# Altium PCB PONG_2.PcbDoc (part 2 of 3)
Units mm, origin at the board's own origin, x right, y up, seen from the top; angles counter-clockwise.
Board outline 310.01 x 220.09 mm, 2 copper layers (Top Layer, Bottom Layer); 106 components, 226 nets, 1005 pads, 373 vias.
Unrouted connection lines stored in the file: 5.
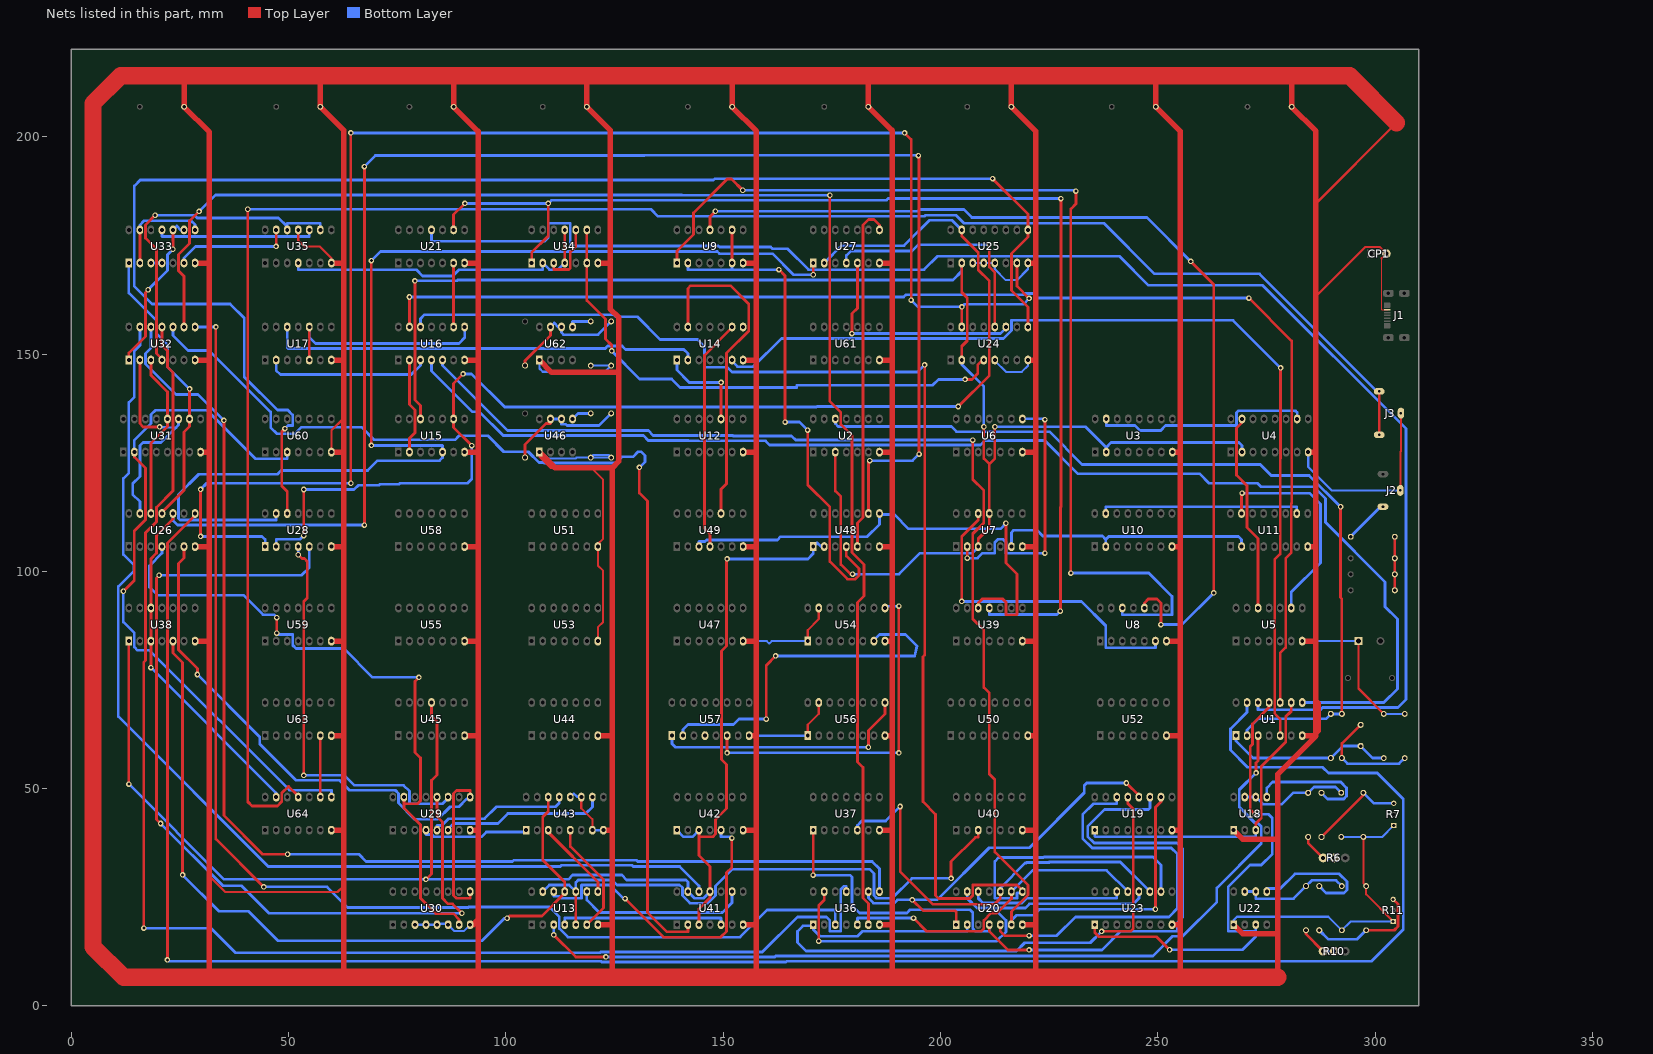
[diagram p2: the nets of this part, all layers, seen from the top]

## Via types
v1: diameter 1.27, hole 0.711, Top Layer to Bottom Layer, 373 vias

## Nets (pads, with @x,y where several pads share a name; then routed paths per layer and width w, separated by ;. In a path a pad name is that pad's centre, name@x,y a point inside that pad or via, vN(x,y) a via of type N, cw(c..) or ccw(c..) an arc to the next point about the centre after c; other vN are vias at no path point) (continued)
ATTRACT: U26.10 U38.3 U38.12 U48.9 U64.13 | length 429.5
  Top Layer w0.635: v1(18.288,77.851) U38.3@18.288,83.929 U38.12@18.288,91.549 18.288,102.895 19.558,104.165 19.558,108.229 23.368,112.039 U26.10@23.368,113.302 ; v1(67.412,110.642) v1(67.412,193.142) ; U48.9@183.404,113.302 183.404,125.136 v1(183.718,125.451) ; v1(194.894,195.656) 195.072,195.478 v1(195.072,126.949)
  Bottom Layer w0.635: v1(18.288,77.851) 47.117,49.022 U64.13@47.117,48.042 ; U26.10@23.368,113.302 23.368,111.658 24.384,110.642 v1(67.412,110.642) ; v1(67.412,193.142) 69.926,195.656 131.857,195.656 131.923,195.723 194.827,195.723 v1(194.894,195.656) ; v1(183.718,125.451) 193.573,125.451 v1(195.072,126.949)
B: U56.9 U57.1 | length 59.3
  Top Layer w0.635: v1(183.413,59.512) 183.413,63.332 187.214,67.132 U56.9@187.214,69.796
  Bottom Layer w0.635: U57.1@138.176,62.176 138.176,60.325 138.989,59.512 v1(183.413,59.512)
B1: U19.13 U20.2 U36.1 | length 156.8
  Top Layer w0.635: v1(237.058,17.145) 243.738,17.145 244.373,17.78 244.373,45.239 243.105,46.507 U19.13@243.105,48.042
  Bottom Layer w0.635: U36.1@170.704,18.669 U36.1@170.704,18.415 ; U20.2@206.142,18.669 206.142,17.145 181.975,17.145 180.85,16.02 172.28,16.02 170.704,17.597 U36.1@170.704,18.415 ; v1(237.058,17.145) 234.442,14.529 219.38,14.529 217.466,12.615 169.071,12.615 167.107,14.58 167.107,17.145 168.377,18.415 U36.1@170.704,18.415
B2: U20.9 U23.13 U36.5 | length 74.9
  Top Layer w0.635: v1(193.777,20.193) 196.825,17.145 209.321,17.145 209.956,17.78 209.956,19.685 211.633,21.361 213.004,21.361 216.302,24.659 U20.9@216.302,26.289
  Bottom Layer w0.635: U36.5@180.864,18.669 180.864,20.193 v1(193.777,20.193) ; U20.9@216.302,26.289 221.195,31.182 238.212,31.182 U23.13@243.105,26.289
B6: U29.4 U43.1 | length 25.1
  Bottom Layer w0.635: U29.4@81.593,40.422 81.593,39.428 82.967,39.428 83.498,38.897 94.38,38.897 95.482,39.998 104.639,39.998 U43.1@104.639,40.422
BALL: U12.10 U14.1 | length 22
  Top Layer w0.635: U12.10@149.49,135.055 v1(149.49,143.458)
  Bottom Layer w0.635: U14.1@139.33,148.611 139.33,146.304 142.175,143.458 v1(149.49,143.458)
BB: U24.4 U34.6 U34.9 | length 123.5
  Top Layer w0.635: U34.9@118.609,178.562 U34.6@118.609,170.942 118.609,162.306 122.885,158.03 122.885,153.467 124.333,152.019 v1(124.333,150.698) ; v1(205.655,144.145) 207.231,144.145 208.547,145.462 208.547,147.472 209.436,148.361 209.952,148.361 U24.4@209.952,148.611
  Bottom Layer w0.635: v1(124.333,150.698) 130.759,144.272 138.125,144.272 140.074,142.323 166.922,142.323 166.922,142.806 198.178,142.806 199.517,144.145 v1(205.655,144.145)
C: U54.7 U57.2 | length 83.1
  Top Layer w0.635: v1(159.893,66.002) 159.893,78.359 v1(162.052,80.518)
  Bottom Layer w0.635: U57.2@140.716,62.176 140.716,63.576 141.859,64.719 152.375,64.719 153.657,66.002 v1(159.893,66.002) ; v1(162.052,80.518) 194.056,80.518 194.564,82.804 191.926,85.442 185.941,85.442 184.674,84.176 U54.7@184.674,83.929
C1: U19.12 U20.1 U36.9 | length 92.4
  Top Layer w0.635: v1(193.497,24.395) 195.997,21.895 203.323,21.895 203.602,21.615 U20.1@203.602,18.669 ; v1(242.748,51.283) 245.645,48.386 U19.12@245.645,48.042
  Bottom Layer w0.635: U36.9@183.404,26.289 183.404,24.8 184.574,23.63 189.354,23.63 190.119,24.395 v1(193.497,24.395) 199.223,24.395 211.217,36.389 220.434,36.389 233.078,49.033 233.078,50.724 233.637,51.283 v1(242.748,51.283)
C2: U20.13 U23.12 U36.13 | length 106.9
  Top Layer w0.635: v1(171.983,14.885) 171.983,23.123 173.244,24.384 U36.13@173.244,26.289
  Bottom Layer w0.635: v1(171.983,14.885) 212.904,14.885 215.036,17.018 215.036,19.685 212.216,22.505 ; U20.13@206.142,26.289 206.142,24.769 208.406,22.505 212.216,22.505 ; U23.12@245.645,26.289 245.645,24.765 244.349,23.47 220.497,23.47 219.533,22.505 212.216,22.505
C5-EN: U14.8 U57.4
C6: U29.5 U43.13 | length 32.7
  Bottom Layer w0.635: U29.5@84.133,40.422 84.133,41.478 85.226,41.478 86.818,43.071 95.065,43.071 97.815,45.822 111.379,45.822 112.259,46.702 U43.13@112.259,48.042
CLK: U2.3 U3.2 U4.2 U7.3 U7.11 U15.12 U24.2 U25.2 | length 375.3
  Top Layer w0.635: v1(79.045,166.843) 79.045,139.415 80.323,138.137 U15.12@80.323,135.055 ; U2.3@175.784,127.435 175.784,118.502 177.063,117.223 177.063,101.546 179.268,99.342 v1(179.756,99.342) ; U24.2@204.872,148.611 204.872,151.786 206.146,153.06 206.146,162.937 204.872,164.211 U25.2@204.872,170.942 ; U7.3@208.682,105.682 208.682,107.501 211.222,110.041 U7.11@211.222,113.302 ; v1(209.956,133.274) 209.956,125.933 211.226,124.663 ; v1(212.496,133.274) 212.496,125.933 211.226,124.663 ; U7.11@211.222,113.302 211.222,124.659 211.226,124.663 ; U7.11@211.222,113.302 211.226,124.663
  Bottom Layer w0.635: v1(79.045,166.843) 88.704,166.843 88.908,167.047 202.861,167.047 204.872,169.058 U25.2@204.872,170.942 ; v1(179.756,99.342) 190.452,99.342 195.275,104.165 207.391,104.165 208.682,105.457 U7.3@208.682,105.682 ; U24.2@204.872,148.611 204.872,147.633 209.956,142.549 v1(209.956,133.274) ; v1(212.496,133.274) 233.375,133.274 238.125,128.524 ; U3.2@238.125,127.435 238.125,128.524 ; U4.2@269.367,127.435 269.367,128.905 268.63,129.642 239.243,129.642 238.125,128.524
D: U54.9 U57.6 | length 80.9
  Top Layer w0.635: v1(150.876,58.217) U57.6@150.876,62.176 ; v1(190.398,58.217) v1(190.398,91.983)
  Bottom Layer w0.635: v1(150.876,58.217) v1(190.398,58.217) ; U54.9@187.214,91.549 187.214,91.983 v1(190.398,91.983)
D1: U19.11 U20.4 U37.1 | length 176.1
  Top Layer w0.635: v1(170.688,30.074) 170.704,30.09 U37.1@170.704,40.422 ; U20.4@211.222,18.669 211.222,17.145 215.49,12.878 v1(220.396,12.878)
  Bottom Layer w0.635: v1(170.688,30.074) 179.146,30.074 179.603,29.616 179.603,23.099 181.342,21.36 192.248,21.36 193.011,22.123 206.781,22.123 207.416,21.488 207.416,17.78 208.051,17.145 211.222,17.145 U20.4@211.222,18.669 ; v1(220.396,12.878) 237.134,12.878 241.412,17.155 254.524,17.155 254.524,19.202 255.676,20.355 255.676,36.195 254.381,37.49 235.382,37.49 233.858,39.014 233.858,41.3 237.769,45.212 247.88,45.212 248.185,45.517 U19.11@248.185,48.042
D2: U20.10 U23.11 U37.5 | length 96.7
  Top Layer w0.635: v1(190.703,45.872) 190.703,30.886 198.23,23.359 212.357,23.359 213.762,24.765 U20.10@213.762,26.289
  Bottom Layer w0.635: U37.5@180.864,40.422 180.864,41.536 181.864,42.536 187.366,42.536 v1(190.703,45.872) ; U20.10@213.762,26.289 213.762,27.149 219.477,32.864 219.734,32.864 219.855,32.984 224.994,32.984 224.994,33.121 241.353,33.121 U23.11@248.185,26.289
D6: U29.6 U43.10 | length 37.8
  Bottom Layer w0.635: U29.6@86.673,40.422 86.673,40.665 87.943,41.936 98.121,41.936 100.432,44.247 118.364,44.247 119.879,45.762 U43.10@119.879,48.042
GND: C1.1 C2.1 C4.1 C5.1 C6.1 C7.1 C8.1 C9.1 C10.1 C11.1 CN1.1 CN2.1 CN3.1 CN4.1 CN5.1 CN6.1 CN7.1 CN8.1 CN9.1 CP1.2 J1.5 J2.1 J3.1 R7.1 R11.1 S1.1 U1.7 U2.7 U3.8 U4.8 U5.7 U6.7 U7.7 U8.7 U9.7 U10.8 U11.8 U12.7 U13.7 U14.7 U15.7 U16.7 U17.7 U18.1 U19.8 U20.7 U21.7 U22.1 U23.8 U24.5 U24.8 U25.3 U25.4 U25.5 U25.8 U26.7 U27.7 U28.7 U29.8 U30.3 U30.4 U30.5 U30.6 U30.8 U31.8 U32.7 U33.7 U34.7 U35.7 U35.11 U36.7 U37.7 U38.7 U39.7 U40.7 U41.7 U42.7 U43.7 U43.8 U43.11 U43.12 U44.7 U45.7 U46.1 U47.7 U48.7 U49.7 U50.8 U51.7 U52.7 U53.7 U54.1 U54.8 U54.15 U55.7 U56.1 U56.8 U56.15 U57.8 U58.7 U59.7 U60.7 U61.7 U62.1 U63.7 U64.7 | length 3573.5
  Top Layer w0.175: 301.549,172.037 301.549,160.177 J1.5@302.756,160.177
  Top Layer w0.508: 31.732,83.929 31.75,83.911 31.75,29.845 35.408,26.187 61.214,26.187 62.647,27.621 62.647,40.422 ; U35.11@52.197,178.562 52.197,176.149 53.594,174.752 57.15,174.752 59.817,172.085 U35.7@59.817,170.942 ; U60.7@59.817,127.435 59.817,132.385 62.59,135.158 62.59,148.611 ; U46.1@107.696,127.435 107.696,126.365 110.236,123.825 111.306,123.825 119.609,123.825 122.352,121.082 122.352,107.502 121.149,106.299 U51.7@121.149,105.682 121.149,101.346 122.352,100.143 122.352,88.341 121.149,87.138 U53.7@121.149,83.929 ; U43.11@117.339,48.042 117.339,45.491 119.879,42.951 U43.7@119.879,40.422 ; U56.1@169.434,62.176 169.434,64.694 171.974,67.234 U56.15@171.974,69.796 ; U54.1@169.434,83.929 169.434,86.462 171.974,89.002 U54.15@171.974,91.549 ; U4.8@284.607,127.435 285.55,127.435 286.385,128.27 ; 286.312,62.176 287.274,63.137 287.274,69.825 286.385,70.714 286.385,83.929 286.385,105.682 286.385,127.435 286.385,128.27 ; S1.1@296.164,83.947 296.164,73.025 C1.1@302.006,67.183 ; C5.1@297.307,38.862 297.307,28.194 C7.1@297.942,27.559 297.942,25.654 R11.1@304.165,19.431 ; 301.549,172.037 CP1.2@302.613,173.101 301.114,174.6 297.688,174.6 286.385,163.297 ; 304.927,203.2 286.385,184.658 286.385,163.297 ; J2.1@305.816,118.618 305.816,127.508 305.943,127.635 J3.1@305.943,136.398 ; 286.385,128.27 286.385,163.297
  Top Layer w1.27: 25.908,213.995 CN1.1@25.908,206.883 31.75,201.041 31.75,83.929 ; U38.7@28.448,83.929 31.732,83.929 ; U26.7@28.448,105.682 31.75,105.682 ; U32.7@28.448,148.611 31.75,148.611 ; U33.7@28.448,170.942 31.75,170.942 ; U31.8@29.718,127.435 31.75,127.435 ; 31.75,6.54 31.75,83.947 ; 57.277,213.995 CN2.1@57.277,206.883 62.611,201.549 62.611,40.386 62.611,6.54 ; U64.7@59.817,40.422 62.647,40.422 ; U63.7@59.817,62.176 62.611,62.176 ; U59.7@59.817,83.929 62.611,83.929 ; U28.7@59.817,105.682 62.611,105.682 ; U60.7@59.817,127.435 62.611,127.435 ; U17.7@59.817,148.611 62.59,148.611 ; U35.7@59.817,170.942 62.611,170.942 ; 87.943,213.995 CN3.1@87.943,206.883 93.599,201.227 93.599,19.812 ; U45.7@90.483,62.176 93.599,62.176 ; U55.7@90.483,83.929 93.599,83.929 ; U58.7@90.483,105.682 93.599,105.682 ; U15.7@90.483,127.435 93.599,127.435 ; U16.7@90.483,148.611 93.599,148.611 ; U21.7@90.483,170.942 93.599,170.942 ; U30.8@91.753,18.669 92.456,18.669 93.599,19.812 ; U29.8@91.753,40.422 93.599,40.422 ; 93.599,6.54 93.599,19.812 ; U46.1@107.696,127.435 111.306,123.825 124.46,123.825 ; U62.1@107.696,148.611 110.511,145.796 125.984,145.796 ; 118.609,213.995 CN4.1@118.609,206.883 123.952,201.54 123.952,160.401 125.984,158.369 125.984,125.349 124.46,123.825 ; U13.7@121.149,18.669 124.46,18.669 ; U44.7@121.149,62.176 124.46,62.176 ; U34.7@121.149,170.942 123.952,170.942 ; U43.8@122.419,40.422 124.46,40.422 ; 124.46,6.54 124.46,123.825 ; 152.03,213.995 CN5.1@152.03,206.883 157.607,201.306 157.607,7.048 157.099,6.54 ; U41.7@154.57,18.669 157.607,18.669 ; U42.7@154.57,40.422 157.607,40.422 ; U47.7@154.57,83.929 157.607,83.929 ; U49.7@154.57,105.682 157.607,105.682 ; U12.7@154.57,127.435 157.607,127.435 ; U14.7@154.57,148.611 157.607,148.611 ; U9.7@154.57,170.942 157.607,170.942 ; U57.8@155.956,62.176 157.607,62.176 ; 183.404,213.995 CN6.1@183.404,206.883 188.849,201.438 188.849,6.54 ; U36.7@185.944,18.669 188.849,18.669 ; U37.7@185.944,40.422 188.849,40.422 ; U48.7@185.944,105.682 188.849,105.682 ; U2.7@185.944,127.435 188.849,127.435 ; U61.7@185.944,148.611 188.849,148.611 ; U27.7@185.944,170.942 188.849,170.942 ; U56.8@187.214,62.176 188.849,62.176 ; U54.8@187.214,83.929 188.849,83.929 ; 216.302,213.995 CN7.1@216.302,206.883 221.869,201.316 221.869,6.54 ; U20.7@218.842,18.669 221.869,18.669 ; U40.7@218.842,40.422 221.869,40.422 ; U39.7@218.842,83.929 221.869,83.929 ; U7.7@218.842,105.682 221.869,105.682 ; U6.7@218.842,127.435 221.869,127.435 ; U50.8@220.112,62.176 221.869,62.176 ; U24.8@220.112,148.611 221.869,148.611 ; U25.8@220.112,170.942 221.869,170.942 ; 249.555,213.995 CN8.1@249.555,206.883 255.143,201.295 255.143,6.54 ; U52.7@251.995,62.176 255.143,62.176 ; U8.7@251.995,83.929 255.143,83.929 ; U23.8@253.265,18.669 255.143,18.669 ; U19.8@253.265,40.422 255.143,40.422 ; U10.8@253.265,105.682 255.143,105.682 ; U3.8@253.365,127.435 255.143,127.435 ; U22.1@267.462,18.669 269.494,16.637 277.622,16.637 ; U18.1@267.462,40.422 269.53,38.354 277.622,38.354 ; 277.622,6.54 277.622,53.34 286.385,62.103 286.385,201.295 CN9.1@280.797,206.883 280.797,213.995 ; U1.7@283.242,62.176 286.312,62.176 ; U5.7@283.242,83.929 286.385,83.929 ; U11.8@284.512,105.682 286.385,105.682 ; U4.8@284.607,127.435 286.385,127.435
  Top Layer w4: 31.115,6.54 62.611,6.54 93.599,6.54 124.46,6.54 157.099,6.54 188.849,6.54 221.869,6.54 255.143,6.54 277.622,6.54 ; 31.75,6.54 12.002,6.54 4.953,13.589 4.953,207.645 11.303,213.995 25.908,213.995 57.277,213.995 87.943,213.995 118.609,213.995 152.03,213.995 183.404,213.995 216.302,213.995 249.555,213.995 280.797,213.995 294.132,213.995 304.927,203.2
  Bottom Layer w0.508: U30.3@79.053,18.669 U30.4@81.593,18.669 U30.5@84.133,18.669 84.349,18.885 86.673,18.885 U30.6@86.673,18.669 88.146,17.196 90.28,17.196 U30.8@91.753,18.669 ; U46.1@107.696,127.435 107.696,126.746 108.921,126.746 109.683,125.984 116.037,125.984 116.218,126.165 C8.1@119.507,126.165 ; U62.1@107.696,148.611 107.696,146.685 108.458,145.923 122.788,145.923 C11.1@124.206,147.341 C10.1@119.507,147.341 ; U43.12@114.799,48.042 115.616,48.86 116.434,48.042 U43.11@117.339,48.042 ; U43.7@119.879,40.422 U43.8@122.419,40.422 ; U47.7@154.57,83.929 160.038,83.929 160.581,83.385 161.124,83.929 U54.1@169.434,83.929 ; U57.8@155.956,62.176 U56.1@169.434,62.176 ; U25.3@207.412,170.942 U25.4@209.952,170.942 U25.5@212.492,170.942 212.492,169.545 215.032,167.005 217.572,167.005 220.112,169.545 U25.8@220.112,170.942 ; U24.5@212.492,148.611 212.492,148.479 215.08,145.891 218.694,145.891 220.112,147.31 U24.8@220.112,148.611 ; U22.1@267.462,18.669 267.462,19.736 268.224,20.498 289.255,20.498 C6.1@292.354,17.399 294.386,19.431 R11.1@304.165,19.431 ; U5.7@283.242,83.929 289.687,83.929 289.705,83.947 S1.1@296.164,83.947 ; U4.8@284.607,127.435 284.607,123.977 289.966,118.618 J2.1@305.816,118.618 ; C4.1@292.227,38.862 C5.1@297.307,38.862 301.625,38.862 R7.1@304.292,41.529 ; C1.1@302.006,67.183 C2.1@306.832,67.183 ; C8.1@119.507,126.165 120.118,126.776 123.595,126.776 C9.1@124.206,126.165 C8.1@119.507,126.165
HBLANK: U9.2 U9.6 U9.9 U48.4 | length 122.2
  Top Layer w0.635: U9.6@152.03,170.942 U9.9@152.03,178.562 ; v1(162.814,169.418) 164.211,168.021 v1(164.211,134.341) ; v1(169.418,132.486) 169.418,119.913 174.523,114.808 174.523,102.244 178.574,98.193 180.367,98.193 181.229,99.055 181.229,100.6 178.324,103.505 U48.4@178.324,105.682
  Bottom Layer w0.635: U9.2@141.87,170.942 141.87,169.418 152.03,169.418 ; U9.6@152.03,170.942 152.03,169.418 ; v1(162.814,169.418) 152.03,169.418 ; v1(164.211,134.341) 167.564,134.341 v1(169.418,132.486)
HIT: U38.1 U41.3 U41.11 U41.13 U42.1 U42.3 U45.11 U48.1 U48.2 | length 347.4
  Top Layer w0.635: v1(13.208,51.029) U38.1@13.208,83.929 ; v1(81.588,29.111) 82.855,30.378 82.855,51.892 84.125,53.162 84.125,65.414 82.863,66.676 U45.11@82.863,69.796 ; U41.3@144.41,18.669 144.41,22.332 146.95,24.872 U41.11@146.95,26.289 146.95,32.08 144.41,34.62 144.41,38.887 ; U42.3@144.41,40.422 144.41,38.887 ; v1(150.901,102.845) 150.77,102.713 150.77,82.804 149.606,81.64 149.606,56.693 150.76,55.539 150.76,45.39 148.23,42.86 148.23,39.544 147.574,38.887 144.41,38.887
  Bottom Layer w0.635: v1(13.208,51.029) 35.125,29.111 v1(81.588,29.111) 114.344,29.111 115.316,30.083 126.671,30.083 127.772,28.981 141.362,28.981 141.87,28.473 U41.13@141.87,26.289 143.394,24.765 145.426,24.765 U41.11@146.95,26.289 ; U42.1@139.33,40.422 140.865,38.887 142.875,38.887 U42.3@144.41,40.422 ; v1(150.901,102.845) 169.485,102.845 170.704,104.064 U48.1@170.704,105.682 171.585,106.563 172.466,105.682 U48.2@173.244,105.682
"HIT SOUND": U31.2 U60.3 U64.8 | length 157.8
  Top Layer w0.635: v1(11.938,95.402) 14.478,97.942 14.478,109.322 17.018,111.862 17.018,123.774 14.478,126.314 U31.2@14.478,127.435
  Bottom Layer w0.635: v1(11.938,95.402) 11.938,88.341 14.478,85.801 14.478,82.55 15.215,81.813 17.983,81.813 50.165,49.632 59.817,49.632 U64.8@59.817,48.042 ; U31.2@14.478,127.435 14.478,130.175 18.288,133.985 18.288,136.042 19.304,137.058 31.161,137.058 42.311,125.908 49.657,125.908 U60.3@49.657,127.435
"HIT SOUND EN": U63.6 U64.9 | length 14.1
  Top Layer w0.635: U64.9@57.277,48.042 U63.6@57.277,62.176
HRESET: U7.6 U10.2 U11.2 | length 61.1
  Bottom Layer w0.635: U7.6@216.302,105.682 216.302,108.904 216.859,109.461 222.161,109.461 223.519,108.102 237.237,108.102 238.025,107.315 ; U10.2@238.025,105.682 238.025,107.315 ; U11.2@269.272,105.682 269.272,107.315 268.586,108.001 238.71,108.001 238.025,107.315
L: U21.9 U34.1 U39.11 | length 273.3
  Top Layer w0.635: U21.9@87.943,178.562 87.943,182.075 v1(90.526,184.658) ; U34.1@105.909,170.942 105.909,173.371 109.728,177.19 v1(109.728,184.658) ; v1(227.559,90.83) 227.625,90.897 227.625,114.719 227.719,114.813 v1(227.719,185.776)
  Bottom Layer w0.635: v1(90.526,184.658) v1(109.728,184.658) 110.439,185.369 187.503,185.369 187.909,185.776 v1(227.719,185.776) ; U39.11@211.222,91.549 211.222,90.035 226.764,90.035 v1(227.559,90.83)
MISSED: U39.12 U48.8 U49.3 | length 113.5
  Top Layer w0.635: U39.12@208.682,91.549 208.682,92.71 209.648,93.675 214.249,93.675 215.036,92.888 215.036,90.018 217.511,90.018 217.576,90.083 217.576,99.365 215.036,101.905 v1(215.036,111.049)
  Bottom Layer w0.635: U49.3@144.41,105.682 144.41,106.873 145.783,106.873 146.137,107.226 162.459,107.226 163.209,107.975 183.134,107.975 185.944,110.785 U48.8@185.944,113.055 ; U48.8@185.944,113.302 U48.8@185.944,113.055 ; v1(215.036,111.049) 213.766,109.779 192.659,109.779 189.382,113.055 U48.8@185.944,113.055
MOVE: U34.2 U34.4 U34.11 U35.4 | length 74.5
  Top Layer w0.635: U34.4@113.529,170.942 U34.11@113.529,178.562
  Bottom Layer w0.635: U35.4@52.197,170.942 52.197,169.418 79.344,169.418 80.784,167.978 87.798,167.978 89.237,169.418 108.449,169.418 U34.2@108.449,170.942 109.973,169.418 112.005,169.418 U34.4@113.529,170.942
NET: U14.2 U17.12 | length 99.5
  Bottom Layer w0.635: U17.12@49.657,156.231 49.657,151.46 49.835,151.282 122.833,151.282 123.384,151.833 126.727,151.833 127.511,151.049 140.917,151.049 141.87,150.097 U14.2@141.87,148.611
NetC1_2: C1.2 R1.2 U1.1 Y1.1 | length 39.1
  Bottom Layer w0.635: U1.1@268.002,62.176 268.002,60.96 271.939,57.023 R1.2@289.814,57.023 292.581,59.79 Y1.1@296.672,59.79 299.439,57.023 C1.2@302.006,57.023
NetC2_2: C2.2 R2.2 Y1.2 | length 25
  Top Layer w0.635: R2.2@292.354,57.023 292.354,60.352 Y1.2@296.672,64.67
  Bottom Layer w0.635: R2.2@292.354,57.023 293.649,55.728 305.537,55.728 C2.2@306.832,57.023
NetC3_1: C3.1 R3.2 R4.2 R5.2 | length 12.3
  Top Layer w0.635: R5.2@304.546,95.631 R4.2@304.546,99.314 R3.2@304.546,102.997 C3.1@304.546,107.95
NetC3_2: C3.2 J2.2 | length 10.3
  Bottom Layer w0.635: C3.2@294.386,107.95 301.304,114.868 J2.2@301.816,114.868
NetC4_2: C4.2 R8.1 U18.6 U18.7 | length 25.1
  Bottom Layer w0.635: U18.7@270.002,48.042 U18.6@272.542,48.042 274.178,46.406 278.536,46.406 281.153,49.022 R8.1@284.607,49.022 285.928,50.343 290.906,50.343 C4.2@292.227,49.022
NetC5_2: C5.2 R7.3 R9.2 | length 22.1
  Top Layer w0.635: R9.2@287.655,38.862 297.307,48.514 C5.2@297.307,49.022
  Bottom Layer w0.635: C5.2@297.307,49.022 299.72,46.609 R7.3@304.292,46.609
NetC6_2: C6.2 R12.1 U22.6 U22.7 | length 26.3
  Bottom Layer w0.635: U22.7@270.002,26.289 U22.6@272.542,26.289 272.542,24.663 281.203,24.663 R12.1@284.099,27.559 285.42,28.88 291.033,28.88 C6.2@292.354,27.559
NetC7_2: C7.2 R11.3 R13.2 | length 26.9
  Top Layer w0.635: C7.2@297.942,17.399 304.419,17.399 305.283,18.263 305.283,23.393 R11.3@304.165,24.511
  Bottom Layer w0.635: R13.2@287.147,17.399 289.204,15.342 295.885,15.342 C7.2@297.942,17.399
NetC8_2: C8.2 U46.5 | length 4.7
  Bottom Layer w0.635: U46.5@115.316,135.055 116.586,136.325 C8.2@119.507,136.325
NetC9_2: C9.2 R15.1 U46.6 U46.7 | length 28.4
  Top Layer w0.635: R15.1@104.394,126.165 104.394,129.143 109.236,133.985 110.236,133.985 U46.7@110.236,135.055
  Bottom Layer w0.635: U46.7@110.236,135.055 U46.6@112.776,135.055 112.776,133.862 113.712,133.862 114.046,133.528 121.408,133.528 C9.2@124.206,136.325
NetC10_2: C10.2 U62.5 | length 5.5
  Bottom Layer w0.635: U62.5@115.316,156.231 115.316,157.501 C10.2@119.507,157.501
NetC11_2: C11.2 R16.1 U62.6 U62.7 | length 28.8
  Top Layer w0.635: R16.1@104.394,147.341 104.394,148.463 110.236,154.305 U62.7@110.236,156.231
  Bottom Layer w0.635: U62.7@110.236,156.231 111.117,157.112 111.998,156.231 U62.6@112.776,156.231 112.776,154.94 113.262,154.454 121.159,154.454 C11.2@124.206,157.501
NetJ3_2: J3.2 J3.5 U64.11 | length 440.5
  Top Layer w0.635: v1(40.564,183.312) 40.564,46.965 41.529,45.999 47.396,45.999 48.387,46.99 48.387,48.946 49.962,50.521 52.197,48.285 U64.11@52.197,48.042 ; J3.2@300.943,131.398 J3.5@300.943,141.398
  Bottom Layer w0.635: v1(40.564,183.312) 133.401,183.312 135.026,181.686 196.266,181.686 196.494,181.915 203.606,181.915 205.435,180.086 237.617,180.086 249.25,168.453 273.376,168.453 300.431,141.398 J3.5@300.943,141.398
NetR1_1: R1.1 R2.1 U1.2 U2.12 | length 197.7
  Top Layer w0.635: v1(292.053,114.855) 292.053,93.95 292.354,93.65 R2.1@292.354,67.183
  Bottom Layer w0.635: U2.12@175.784,135.055 175.784,133.985 176.444,133.325 202.489,133.325 203.683,132.131 225.044,132.131 232.57,124.604 273.566,124.604 276.098,122.072 284.836,122.072 v1(292.053,114.855) ; U1.2@270.542,62.176 270.542,63.489 273.097,66.045 288.676,66.045 R1.1@289.814,67.183 R2.1@292.354,67.183
NetR6_CCW: R6.CCW R6.W R8.2 | length 8.8
  Top Layer w0.635: R8.2@284.607,38.862 284.607,37.465 R6.CCW@288.036,34.036
  Bottom Layer w0.635: R6.CCW@288.036,34.036 R6.W@290.576,34.036
NetR9_1: R9.1 U18.5 | length 30.1
  Bottom Layer w0.635: U18.5@275.082,48.042 275.082,50.165 276.403,51.486 292.1,51.486 293.421,50.165 293.421,48.26 292.786,47.625 289.052,47.625 R9.1@287.655,49.022
NetR10_CCW: R10.CCW R10.W R12.2 | length 9
  Top Layer w0.635: R12.2@284.099,17.399 284.099,16.51 R10.CCW@288.036,12.573
  Bottom Layer w0.635: R10.CCW@288.036,12.573 R10.W@290.576,12.573
NetR13_1: R13.1 U22.5 | length 30.6
  Bottom Layer w0.635: U22.5@275.082,26.289 275.082,27 278.181,27 281.559,30.378 291.744,30.378 293.548,28.575 293.548,26.67 292.837,25.959 288.747,25.959 R13.1@287.147,27.559
NetU1_3: U1.3 U13.3 | length 209
  Top Layer w0.635: v1(110.989,16.341) 116.078,11.252 v1(122.987,11.252) ; v1(272.618,53.619) 272.618,55.924 273.082,56.388 U1.3@273.082,62.176
  Bottom Layer w0.635: v1(110.989,16.341) U13.3@110.989,18.669 ; v1(122.987,11.252) 123.006,11.233 161.83,11.233 162.077,11.48 248.869,11.48 253.409,16.02 255.659,16.02 263.576,23.937 263.576,27.153 273.812,37.389 273.812,41.275 272.948,42.139 272.313,42.139 268.732,45.72 268.732,49.733 v1(272.618,53.619)
NetU1_5: U1.5 U14.6 | length 223.1
  Top Layer w0.635: U1.5@278.162,62.176 278.162,65.964 276.885,67.24 276.885,102.718 278.155,103.988 278.155,125.908 278.257,126.009 v1(278.257,146.787)
  Bottom Layer w0.635: U14.6@152.03,148.611 152.03,148.351 153.289,147.091 156.896,147.091 163.387,153.583 214.466,153.583 216.306,155.423 216.306,157.759 267.284,157.759 v1(278.257,146.787)
NetU1_8: U1.8 U16.4 | length 295.1
  Bottom Layer w0.635: U16.4@82.863,148.611 82.863,146.093 92.253,136.703 93.904,136.703 99.365,131.242 131.626,131.242 132.743,130.124 141.986,130.124 142.088,130.023 159.69,130.023 160.655,129.057 209.169,129.057 210.21,130.099 223.977,130.099 231.648,122.428 259.666,122.428 261.825,120.269 272.948,120.269 273.761,119.456 285.847,119.456 288.569,116.733 288.569,111.277 302.285,97.561 302.285,91.846 305.13,89.002 305.13,72.923 302.002,69.796 U1.8@283.242,69.796
NetU1_9: U1.9 U18.3 U19.1 | length 72.7
  Top Layer w0.635: U18.3@272.542,40.422 272.542,41.96 273.812,43.23 273.812,55.042 279.425,60.655 279.425,66.523 280.702,67.799 U1.9@280.702,69.796
  Bottom Layer w0.635: U19.1@235.485,40.422 235.485,39.117 235.714,38.887 272.542,38.887 U18.3@272.542,40.422
NetU1_10: U1.10 U16.13 | length 299.1
  Top Layer w0.635: U16.13@77.783,156.231 v1(77.783,163.122) ; v1(270.942,162.865) 280.797,153.01 280.797,115.646 280.695,115.545 280.695,104.242 279.425,102.972 279.425,82.423 278.162,81.16 U1.10@278.162,69.796
  Bottom Layer w0.635: v1(77.783,163.122) 191.515,163.122 192.034,163.642 219.075,163.642 219.358,163.925 221.25,163.925 222.31,162.865 v1(270.942,162.865)
NetU1_11: U1.11 U22.3 U23.1 | length 114.9
  Top Layer w0.635: U23.1@235.485,18.669 235.485,16.884 236.474,15.895 249.713,15.895 v1(252.705,12.903) ; v1(272.39,44.094) 271.272,45.212 271.272,59.665 271.805,60.198 271.805,64.897 275.622,68.714 U1.11@275.622,69.796
  Bottom Layer w0.635: v1(252.705,12.903) 269.494,12.903 272.542,15.951 272.542,17.145 ; v1(272.39,44.094) 275.438,44.094 276.352,43.18 276.352,34.925 273.812,32.385 271.196,32.385 266.192,27.381 266.192,17.145 272.542,17.145 ; U22.3@272.542,18.669 272.542,17.145
NetU1_12: U1.12 U21.11 | length 354.2
  Bottom Layer w0.635: U21.11@82.863,178.562 82.863,176.149 83.066,175.946 108.814,175.946 109.728,176.86 109.728,180.111 114.808,180.111 114.808,175.387 115.341,174.854 148.92,174.854 149.161,174.612 160.909,174.612 161.285,174.236 164.803,174.236 169.621,169.418 196.19,169.418 199.263,172.491 241.173,172.491 247.853,165.811 274.142,165.811 307.086,132.867 307.086,70.485 305.232,68.631 287.909,68.631 287.426,68.148 273.082,68.148 U1.12@273.082,69.796
NetU1_13: U1.13 U26.8 | length 480
  Top Layer w0.635: v1(22.098,10.566) 22.098,106.477 28.448,112.827 U26.8@28.448,113.302
  Bottom Layer w0.635: v1(22.098,10.566) 22.428,10.236 121.877,10.236 122.022,10.092 164.448,10.092 164.593,10.236 299.11,10.236 306.476,17.602 306.476,47.625 300.507,53.594 289.255,53.594 287.934,54.915 270.662,54.915 266.725,58.852 266.725,63.747 270.542,67.564 U1.13@270.542,69.796
NetU3_15: U3.15 U4.10 | length 51.2
  Bottom Layer w0.635: U3.15@238.125,135.055 238.125,133.528 244.769,133.528 245.89,132.407 250.68,132.407 251.801,133.528 268.097,133.528 268.097,136.525 268.528,136.956 281.636,136.956 282.067,136.525 U4.10@282.067,135.055
NetU4_15: U4.15 U5.12 | length 46.1
  Top Layer w0.635: U4.15@269.367,135.055 269.367,134.238 268.097,132.968 268.097,122.123 270.535,119.685 270.535,110.058 273.082,107.512 U5.12@273.082,91.549
NetU5_9: U5.9 U11.15 | length 50.5
  Top Layer w0.635: U11.15@269.272,113.302 269.272,117.86 v1(269.392,117.98)
  Bottom Layer w0.635: v1(269.392,117.98) 284.953,117.98 287.426,115.506 287.426,101.924 280.702,95.199 U5.9@280.702,91.549
NetU6_8: U6.8 U7.2 | length 62.6
  Top Layer w0.635: v1(206.142,103.022) U7.2@206.142,105.682 ; v1(224.028,104.169) v1(224.028,134.925)
  Bottom Layer w0.635: v1(206.142,103.022) 208.534,103.022 209.677,104.165 212.496,104.165 212.496,106.68 213.182,107.366 214.357,107.366 215.043,106.68 215.043,104.169 v1(224.028,104.169) ; U6.8@218.842,135.055 218.842,135.077 223.876,135.077 v1(224.028,134.925)
NetU7_12: U7.12 U8.6 | length 75.3
  Top Layer w0.635: v1(204.876,93.066) 204.876,107.979 208.682,111.785 U7.12@208.682,113.302
  Bottom Layer w0.635: v1(204.876,93.066) 232.423,93.066 238.023,87.465 238.023,82.398 249.455,82.398 U8.6@249.455,83.929
NetU8_10: U8.10 U9.11 | length 223.6
  Top Layer w0.635: U9.11@146.95,178.562 146.95,181.595 v1(148.209,182.855) ; U8.10@246.915,91.549 246.915,92.71 247.804,93.599 249.834,93.599 250.723,92.71 v1(250.723,87.732) ; v1(257.581,171.323) 262.865,166.04 v1(262.865,95.047)
  Bottom Layer w0.635: v1(148.209,182.855) 194.817,182.855 195.208,183.245 205.375,183.245 207.208,181.412 247.493,181.412 v1(257.581,171.323) ; v1(250.723,87.732) 255.549,87.732 v1(262.865,95.047)
NetU8_12: U8.12 U9.1 | length 236.6
  Top Layer w0.635: U9.1@139.33,170.942 139.33,173.711 143.15,177.531 143.15,182.495 150.927,190.271 151.892,190.271 v1(154.483,187.681) ; v1(229.989,99.593) 229.989,183.414 231.165,184.591 v1(231.165,187.505)
  Bottom Layer w0.635: v1(154.483,187.681) 230.99,187.681 v1(231.165,187.505) ; v1(229.989,99.593) 247.904,99.593 253.263,94.234 253.263,90.018 241.835,90.018 U8.12@241.835,91.549
NetU10_15: U10.15 U11.10 | length 47
  Bottom Layer w0.635: U10.15@238.025,113.302 238.025,114.833 281.972,114.833 U11.10@281.972,113.302
NetU13_4: U13.4 U41.5 | length 39
  Bottom Layer w0.635: U13.4@113.529,18.669 113.529,20.193 149.49,20.193 U41.5@149.49,18.669
NetU13_5: U13.5 U13.10 U13.13 U40.3 | length 134.7
  Top Layer w0.635: U13.5@116.069,18.669 U13.10@116.069,26.289 ; v1(202.413,29.337) 202.413,33.198 208.001,38.786 208.682,38.786 U40.3@208.682,40.422
  Bottom Layer w0.635: U13.13@108.449,26.289 109.973,27.813 114.545,27.813 U13.10@116.069,26.289 116.069,28.397 116.62,28.948 124.426,28.948 125.536,27.838 139.954,27.838 140.6,27.193 140.6,25.4 142.37,23.63 146.49,23.63 148.23,25.37 148.23,27.559 152.116,31.445 183.693,31.445 184.683,30.455 184.683,25.4 185.318,24.765 188.841,24.765 193.413,29.337 v1(202.413,29.337)
NetU13_6: U13.6 U43.5 | length 26.5
  Top Layer w0.635: U43.5@114.799,40.422 114.799,36.687 122.428,29.058 122.428,22.521 118.609,18.702 U13.6@118.609,18.669
NetU13_8: U13.8 U43.3 | length 18.9
  Top Layer w0.635: U43.3@109.719,40.422 109.719,39.954 121.149,28.524 U13.8@121.149,26.289
NetU13_9: U13.9 U41.9 | length 40
  Bottom Layer w0.635: U13.9@118.609,26.289 118.609,24.333 121.455,21.487 149.783,21.487 152.03,23.734 U41.9@152.03,26.289
NetU13_11: U13.11 U38.5 U43.14 | length 178.2
  Top Layer w0.635: U38.5@23.368,83.929 23.368,81.178 25.578,78.969 v1(25.578,30.124) ; v1(100.277,20.152) 100.826,20.701 108.28,20.701 113.529,25.95 U13.11@113.529,26.289 113.529,28.533 108.458,33.604 108.458,43.494 109.719,44.755 U43.14@109.719,48.042
  Bottom Layer w0.635: v1(25.578,30.124) 33.934,21.768 40.767,21.768 47.546,14.989 94.491,14.989 99.654,20.152 v1(100.277,20.152)
NetU13_12: U13.12 U42.5 | length 75.7
  Top Layer w0.635: v1(127.406,24.663) 136.271,15.799 149.413,15.799 150.76,17.145 150.76,30.658 151.968,31.866 v1(151.968,38.583)
  Bottom Layer w0.635: U13.12@110.989,26.289 110.989,25.197 112.268,25.197 112.689,24.775 117.348,24.775 117.348,27.813 123.876,27.813 127.025,24.663 v1(127.406,24.663) ; U42.5@149.49,40.422 149.49,38.887 151.663,38.887 v1(151.968,38.583)
NetU14_9: U14.9 U49.4 | length 53.7
  Top Layer w0.635: U49.4@146.95,105.682 146.95,108.574 145.669,109.854 145.669,149.704 152.03,156.064 U14.9@152.03,156.231
NetU14_13: U14.13 U49.10 | length 75.7
  Top Layer w0.635: U14.13@141.87,156.231 141.87,165.1 142.505,165.735 151.649,165.735 155.854,161.529 155.854,155.298 150.749,150.193 150.749,120.142 149.49,118.882 U49.10@149.49,113.302
NetU15_2: U15.2 U16.2 | length 22.2
  Top Layer w0.635: U15.2@77.783,127.435 77.783,130.615 79.045,131.877 79.045,137.145 77.783,138.407 U16.2@77.783,148.611
NetU15_5: U15.5 U27.1 U28.13 | length 263.2
  Top Layer w0.635: v1(69.012,128.956) v1(69.012,171.501) ; v1(170.704,168.25) U27.1@170.704,170.942
  Bottom Layer w0.635: U28.13@47.117,113.302 47.117,111.785 25.004,111.785 24.638,112.152 24.638,117.678 29.302,122.342 47.406,122.342 48.253,123.19 68.169,123.19 70.43,125.451 84.709,125.451 85.403,126.145 U15.5@85.403,127.435 85.403,128.956 v1(69.012,128.956) ; v1(69.012,171.501) 71.12,173.609 148.591,173.609 149.098,173.101 161.337,173.101 166.189,168.25 v1(170.704,168.25)
NetU15_9: U15.9 U25.15 U27.2 U28.2 | length 285.5
  Top Layer w0.635: v1(53.467,108.229) v1(53.467,118.821) ; v1(90.112,145.408) 87.943,143.239 U15.9@87.943,135.055 87.943,133.088 v1(92.126,128.905) ; v1(204.079,137.922) 211.226,145.069 211.226,166.827 208.686,169.367 208.686,173.38 204.872,177.194 U25.15@204.872,178.562
  Bottom Layer w0.635: U28.2@47.117,105.682 47.117,107.366 52.603,107.366 v1(53.467,108.229) ; v1(53.467,118.821) 65.049,118.821 66.009,119.781 70.773,119.781 71.023,120.031 75.376,120.031 75.587,120.242 91.083,120.242 92.126,121.285 v1(92.126,128.905) ; v1(90.112,145.408) 92.092,145.408 99.716,137.783 171.462,137.783 171.601,137.922 v1(204.079,137.922) ; U27.2@173.244,170.942 177.241,174.939 191.619,174.939 197.459,180.78 202.655,180.78 U25.15@204.872,178.562
NetU16_3: U16.3 U17.2 | length 38.1
  Bottom Layer w0.635: U17.2@47.117,148.611 47.117,146.253 48.087,145.284 78.202,145.284 80.323,147.404 U16.3@80.323,148.611
NetU16_5: U16.5 U19.10 U20.6 | length 312.4
  Top Layer w0.635: v1(207.416,130.195) 207.416,121.133 209.956,118.593 209.956,111.176 207.416,108.636 207.416,89.052 209.956,86.512 209.956,73.228 211.226,71.958 211.226,53.289 212.496,52.019 212.496,35.408 220.116,27.788 220.116,25.506 216.302,21.692 U20.6@216.302,18.669 ; v1(249.453,22.225) 249.453,45.695 250.725,46.966 U19.10@250.725,48.042
  Bottom Layer w0.635: U16.5@85.403,148.611 85.403,147.337 100.355,132.385 132.753,132.385 133.87,131.267 152.167,131.267 152.273,131.161 165.709,131.161 166.675,130.195 v1(207.416,130.195) ; U20.6@216.302,18.669 216.302,19.706 217.424,20.828 221.31,20.828 222.707,22.225 v1(249.453,22.225)
NetU16_8: U16.8 U17.5 U17.10 | length 49.4
  Top Layer w0.635: U17.5@54.737,148.611 U17.10@54.737,156.231
  Bottom Layer w0.635: U17.10@54.737,156.231 54.737,153.822 56.134,152.425 89.154,152.425 90.483,153.754 U16.8@90.483,156.231
NetU16_9: U16.9 U21.6 | length 14.7
  Top Layer w0.635: U16.9@87.943,156.231 U21.6@87.943,170.942
NetU16_12: U16.12 U20.8 U23.10 | length 336.3
  Top Layer w0.635: v1(196.342,147.498) 196.342,80.717 195.939,80.315 195.939,46.986 198.857,44.069 198.857,25.4 199.542,24.714 206.731,24.714 207.416,25.4 207.416,27.813 217.572,27.813 218.842,26.543 U20.8@218.842,26.289
  Bottom Layer w0.635: U16.12@80.323,156.231 80.323,158.115 81.263,159.055 124.79,159.055 125.273,158.572 130.251,158.572 135.484,153.34 144.105,153.34 145.68,151.765 145.68,146.93 150.936,146.93 152.019,145.847 194.691,145.847 v1(196.342,147.498) ; U20.8@218.842,26.289 218.842,26.035 217.703,26.035 217.576,25.908 217.576,24.775 212.496,24.775 212.496,33.249 213.367,34.119 223.722,34.119 223.859,34.256 248.854,34.256 250.725,32.385 U23.10@250.725,26.289
NetU19_14: U19.14 U20.5 | length 97
  Top Layer w0.635: U20.5@213.762,18.669 213.762,17.145 214.753,16.154 v1(220.396,16.154)
  Bottom Layer w0.635: v1(220.396,16.154) 226.746,16.154 231.064,20.472 252.552,20.472 254.533,22.454 254.533,34.9 253.086,36.347 234.903,36.347 232.715,38.536 232.715,44.018 235.204,46.507 240.565,46.507 U19.14@240.565,48.042
NetU20_10: U20.12 U23.14 | length 35.9
  Bottom Layer w0.635: U20.12@208.682,26.289 208.682,24.765 209.807,23.64 218.697,23.64 219.821,24.765 240.565,24.765 U23.14@240.565,26.289
NetU24_9: U24.9 U25.9 U28.12 | length 343.4
  Top Layer w0.635: v1(49.098,132.817) 48.387,132.105 48.387,119.634 49.657,118.364 U28.12@49.657,113.302 ; v1(211.963,190.348) 211.963,190.344 220.112,182.194 U25.9@220.112,178.562 220.112,176.907 216.306,173.101 216.306,164.612 220.112,160.806 U24.9@220.112,156.231
  Bottom Layer w0.635: v1(49.098,132.817) 49.809,133.528 50.917,133.528 50.917,136.002 49.784,137.135 47.396,137.135 39.776,144.755 39.776,158.267 36.53,161.514 18.539,161.514 14.478,165.575 14.478,188.671 15.824,190.017 147.726,190.017 148.057,190.348 v1(211.963,190.348)
NetU24_11: U24.11 U27.5 | length 52.9
  Top Layer w0.635: v1(179.603,154.718) 179.603,159.283 180.864,160.544 U27.5@180.864,170.942
  Bottom Layer w0.635: v1(179.603,154.718) 213.769,154.718 215.032,155.981 U24.11@215.032,156.231
NetU24_12: U24.12 U27.4 | length 55.1
  Top Layer w0.635: v1(211.226,175.158) 211.226,170.002 212.492,168.736 U24.12@212.492,156.231
  Bottom Layer w0.635: U27.4@178.324,170.942 178.324,172.644 179.391,173.711 193.447,173.711 194.895,175.158 v1(211.226,175.158)
NetU24_15: U24.15 U25.7 U28.1 | length 352.5
  Top Layer w0.635: v1(29.718,108.026) v1(29.718,118.847) ; v1(64.287,120.269) v1(64.287,200.889) ; v1(191.745,200.889) 193.238,199.395 v1(193.238,162.413) ; U24.15@204.872,156.231 204.872,160.829 v1(204.902,160.858) ; U25.7@217.572,170.942 217.572,165.612 v1(220.396,162.789)
  Bottom Layer w0.635: v1(29.718,108.026) 43.866,108.026 44.577,107.315 U28.1@44.577,105.682 ; v1(29.718,118.847) 31.14,120.269 v1(64.287,120.269) ; v1(64.287,200.889) v1(191.745,200.889) ; v1(193.238,162.413) 194.793,160.858 v1(204.902,160.858) 205.486,161.442 219.05,161.442 v1(220.396,162.789)
NetU26_4: U26.4 U29.15 U30.7 | length 155.1
  Top Layer w0.635: v1(47.244,85.776) v1(47.244,89.357) ; U29.15@76.513,48.042 76.513,46.507 ; v1(79.955,75.59) 79.045,74.681 79.045,58.344 80.315,57.074 80.315,47.193 79.629,46.507 76.513,46.507 ; U30.7@89.213,18.669 89.213,19.88 87.884,21.209 83.871,21.209 80.315,24.765 80.315,41.681 76.513,45.483 76.513,46.507
  Bottom Layer w0.635: U26.4@20.828,105.682 20.828,104.165 17.923,101.26 17.923,96.361 19.77,94.513 39.573,94.513 44.069,90.018 46.584,90.018 v1(47.244,89.357) ; v1(47.244,85.776) 47.574,85.446 50.927,85.446 50.927,82.982 51.689,82.22 62.68,82.22 69.31,75.59 v1(79.955,75.59)
NetU26_6: U26.6 U29.9 U30.9 | length 147.7
  Top Layer w0.635: U26.6@25.908,105.682 25.908,103.073 24.638,101.803 24.638,81.94 28.981,77.597 v1(28.981,76.251) ; U30.9@91.753,26.289 91.753,24.765 88.57,24.765 87.935,25.4 87.935,48.895 88.618,49.578 91.753,49.578 U29.9@91.753,48.042
  Bottom Layer w0.635: v1(28.981,76.251) 43.307,61.925 43.307,60.323 51.721,51.91 61.719,51.91 64.014,49.614 74.516,49.614 75.235,48.895 75.235,46.69 78.999,42.926 84.278,42.926 87.174,45.822 89.154,45.822 90.932,47.6 91.753,47.6 U29.9@91.753,48.042
NetU26_11: U26.11 U31.10 U33.1 | length 66.1
  Top Layer w0.635: U26.11@20.828,113.302 20.828,113.58 25.908,118.66 25.908,132.055 27.178,133.325 U31.10@27.178,135.055 v1(27.178,141.961)
  Bottom Layer w0.635: U33.1@13.208,170.942 13.208,164.033 19.558,157.683 19.558,154.711 22.098,152.171 22.098,147.041 v1(27.178,141.961)
NetU26_12: U26.12 U31.12 U32.3 | length 38.5
  Top Layer w0.635: U26.12@18.288,113.302 18.288,129.489 22.098,133.299 U31.12@22.098,135.055 22.098,141.3 18.288,145.11 U32.3@18.288,148.611
NetU26_13: U26.13 U31.11 U32.2 | length 52.5
  Top Layer w0.635: U32.2@15.748,148.611 15.748,133.985 16.51,133.223 v1(20.269,133.223)
  Bottom Layer w0.635: U26.13@15.748,113.302 15.748,116.039 14.083,117.704 14.083,120.154 15.748,121.818 15.748,128.905 16.485,129.642 20.625,129.642 24.041,133.058 ; v1(20.269,133.223) 24.041,133.058 ; U31.11@24.638,135.055 24.638,133.655 24.041,133.058
NetU27_8: U27.8 U48.5 | length 80.5
  Top Layer w0.635: U48.5@180.864,105.682 180.864,111.116 182.143,112.395 182.143,179.705 183.413,180.975 184.674,180.975 185.944,179.705 U27.8@185.944,178.562
NetU28_4: U28.4 U29.11 | length 92.5
  Top Layer w0.635: v1(52.197,103.81) 53.056,102.95 53.594,102.95 54.254,102.29 54.254,93.853 53.467,93.066 v1(53.467,53.045)
  Bottom Layer w0.635: v1(52.197,103.81) U28.4@52.197,105.682 ; v1(53.467,53.045) 62.854,53.045 65.149,50.749 76.454,50.749 77.775,49.428 77.775,46.507 85.403,46.507 86.673,47.777 U29.11@86.673,48.042
NetU28_5: U28.5 U29.12 | length 205.5
  Top Layer w0.635: v1(20.193,99.085) 19.558,98.45 19.558,42.926 v1(20.523,41.961) ; U29.12@84.133,48.042 84.133,43.578 85.395,42.316 85.395,24.765 86.69,23.47 87.706,23.47 v1(89.865,21.311)
  Bottom Layer w0.635: v1(20.193,99.085) 52.945,99.085 54.737,100.878 U28.5@54.737,105.682 ; v1(20.523,41.961) 34.849,27.635 39.135,27.635 45.459,21.311 v1(89.865,21.311)
NetU32_1: U32.1 U33.9 U33.10 | length 37.4
  Top Layer w0.635: U32.1@13.208,148.611 13.208,150.241 17.018,154.051 17.018,164.186 v1(17.628,164.795) ; v1(23.368,174.117) U33.10@23.368,178.562
  Bottom Layer w0.635: v1(17.628,164.795) 22.098,169.266 22.098,172.847 v1(23.368,174.117) ; U33.10@23.368,178.562 24.249,179.443 25.13,178.562 U33.9@25.908,178.562
NetU32_4: U32.4 U35.9 U35.12 | length 78
  Top Layer w0.635: v1(19.253,181.94) 17.018,179.705 17.018,176.657 19.558,174.117 19.558,150.139 20.828,148.869 U32.4@20.828,148.611
  Bottom Layer w0.635: v1(19.253,181.94) 28.346,181.94 28.956,181.331 47.676,181.331 U35.12@49.657,179.349 ; U35.12@49.657,178.562 U35.12@49.657,179.349 ; U35.9@57.277,178.562 57.277,180.086 49.657,180.086 U35.12@49.657,179.349
NetU32_8: U32.8 U36.3 | length 282.1
  Top Layer w0.635: v1(33.223,156.235) 33.223,38.405 v1(44.247,27.381)
  Bottom Layer w0.635: U32.8@28.448,156.231 28.448,156.21 33.198,156.21 v1(33.223,156.235) ; v1(44.247,27.381) 58.799,27.381 63.571,22.609 91.296,22.609 91.42,22.733 109.997,22.733 112.268,20.462 112.268,17.78 114.251,15.797 153.844,15.797 160.099,22.052 175.678,22.052 175.784,21.946 U36.3@175.784,18.669
NetU32_9: U32.9 U36.6 | length 348.6
  Top Layer w0.635: U32.9@25.908,156.231 25.908,167.894 24.638,169.164 24.638,172.872 27.178,175.412 27.178,180.645 v1(29.362,182.829) ; v1(174.523,186.538) 174.523,139.116 177.063,136.576 177.063,133.782 179.603,131.242 179.603,104.343 182.372,101.575 182.372,94.31 180.873,92.812 180.873,56.159 182.143,54.889 182.143,24.832 183.404,23.571 U36.6@183.404,18.669
  Bottom Layer w0.635: v1(29.362,182.829) 33.139,186.606 140.419,186.606 140.488,186.538 v1(174.523,186.538)
NetU32_10: U32.10 U41.2 | length 247.5
  Top Layer w0.635: v1(130.683,123.901) 130.683,118.034 132.563,116.154 132.563,21.488 136.982,17.069 141.87,17.069 U41.2@141.87,18.669
  Bottom Layer w0.635: U32.10@23.368,156.231 23.368,154.305 26.848,150.825 31.674,150.825 45.847,136.652 45.847,133.071 47.244,131.674 51.435,131.674 52.934,133.172 66.751,133.172 69.672,130.251 88.29,130.251 89.222,131.183 95.817,131.183 99.492,127.508 105.131,127.508 107.603,125.035 108.61,125.035 108.733,124.912 125.294,124.912 126.721,126.34 129.235,126.34 130.429,127.533 131.064,127.533 131.978,126.619 131.978,125.197 v1(130.683,123.901)
NetU32_11: U32.11 U36.11 | length 323.7
  Top Layer w0.635: v1(16.662,17.882) 16.662,79.096 17.018,79.451 17.018,108.862 19.558,111.402 19.558,114.715 23.368,118.525 23.368,145.745 22.098,147.015 22.098,150.749 20.828,152.019 U32.11@20.828,156.231
  Bottom Layer w0.635: v1(16.662,17.882) 32.061,17.882 37.725,12.217 121.595,12.217 121.767,12.389 126.266,12.389 126.287,12.368 158.977,12.368 167.081,20.472 173.736,20.472 174.523,19.685 174.523,17.155 177.044,17.155 177.044,26.803 177.784,27.543 178.324,27.543 U36.11@178.324,26.289
NetU32_12: U32.12 U36.8 | length 284.8
  Top Layer w0.635: v1(35.077,134.747) 35.077,43.815 44.013,34.88 v1(49.728,34.88)
  Bottom Layer w0.635: U32.12@18.288,156.231 18.288,151.409 17.018,150.139 17.018,147.726 24.054,140.691 29.134,140.691 v1(35.077,134.747) ; v1(49.728,34.88) 66.141,34.88 67.825,33.196 101.498,33.196 101.789,33.488 130.076,33.488 130.33,33.234 184.26,33.234 185.944,31.549 U36.8@185.944,26.289
NetU32_13: U32.13 U41.12 | length 245
  Bottom Layer w0.635: U32.13@15.748,156.231 15.748,152.019 14.478,150.749 14.478,140.132 13.208,138.862 13.208,122.653 11.938,121.383 11.938,103.861 14.351,101.448 14.351,100.101 10.795,96.545 10.795,66.548 45.288,32.055 112.51,32.055 112.808,32.353 128.941,32.353 129.239,32.055 139.965,32.055 144.41,27.61 U41.12@144.41,26.289
NetU33_2: U33.2 U33.8 U33.13 | length 23.5
  Top Layer w0.635: U33.2@15.748,170.942 U33.13@15.748,178.562
  Bottom Layer w0.635: U33.13@15.748,178.562 15.748,179.705 16.713,180.67 27.559,180.67 28.448,179.781 U33.8@28.448,178.562
NetU33_3: U33.3 U33.4 | length 2.5
  Bottom Layer w0.635: U33.3@18.288,170.942 U33.4@20.828,170.942
NetU33_6: U33.6 U35.13 | length 27.3
  Top Layer w0.635: v1(47.117,174.752) U35.13@47.117,178.562
  Bottom Layer w0.635: U33.6@25.908,170.942 25.908,172.085 28.575,174.752 v1(47.117,174.752)
NetU33_11: U33.11 U35.10 | length 37
  Bottom Layer w0.635: U33.11@20.828,178.562 20.828,177.038 54.737,177.038 U35.10@54.737,178.562
NetU34_3: U34.3 U34.10 | length 14.8
  Top Layer w0.635: U34.3@110.989,170.942 110.989,169.428 114.437,169.428 114.808,169.799 114.808,173.491 116.069,174.752 U34.10@116.069,178.562